# Altium PCB LEDDimmer.PcbDoc
Units mil, origin at the board's own origin, x right, y up, seen from the top; angles counter-clockwise.
Board outline 2708 x 1904 mil, 2 copper layers (Top Layer, Bottom Layer); 33 components, 16 nets, 85 pads, 57 vias.
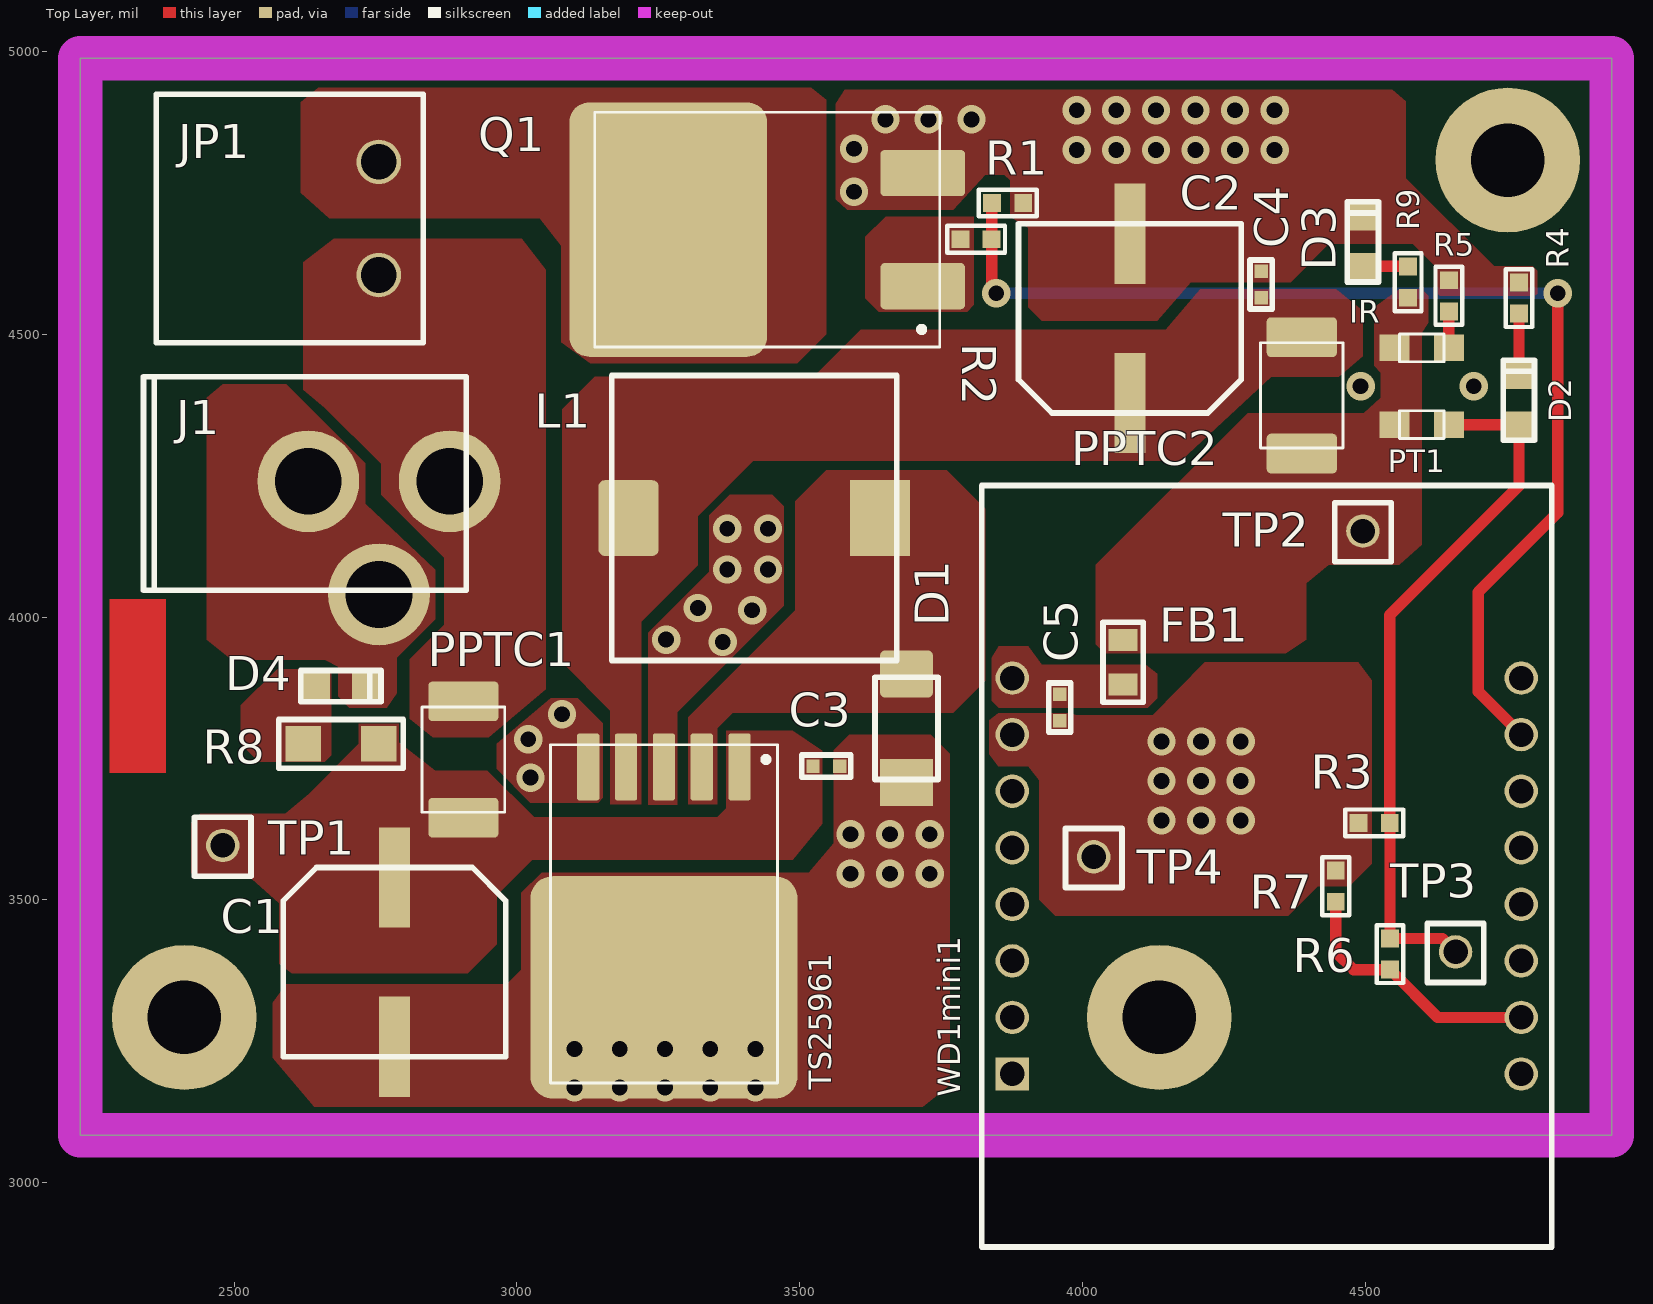
[diagram p0: Top Layer view]
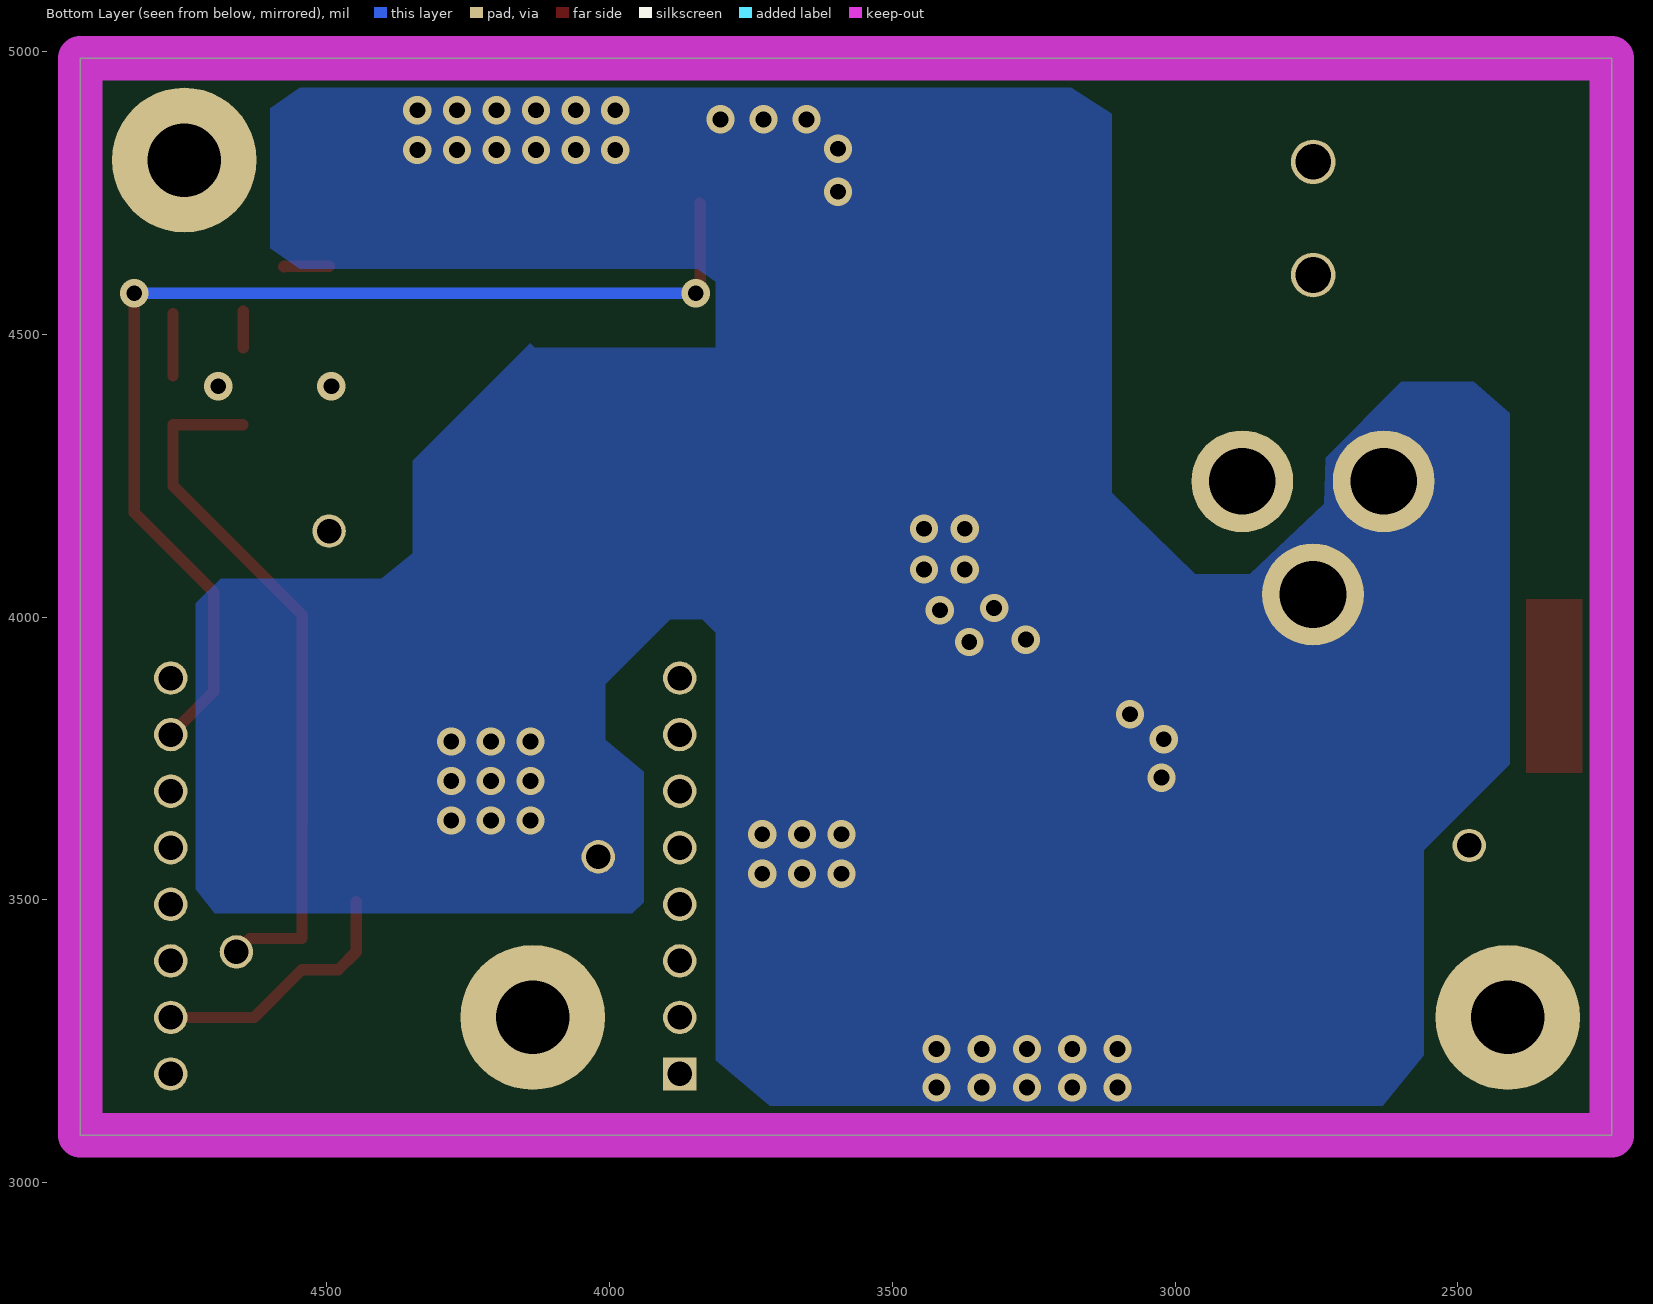
[diagram p1: Bottom Layer view, seen from below]
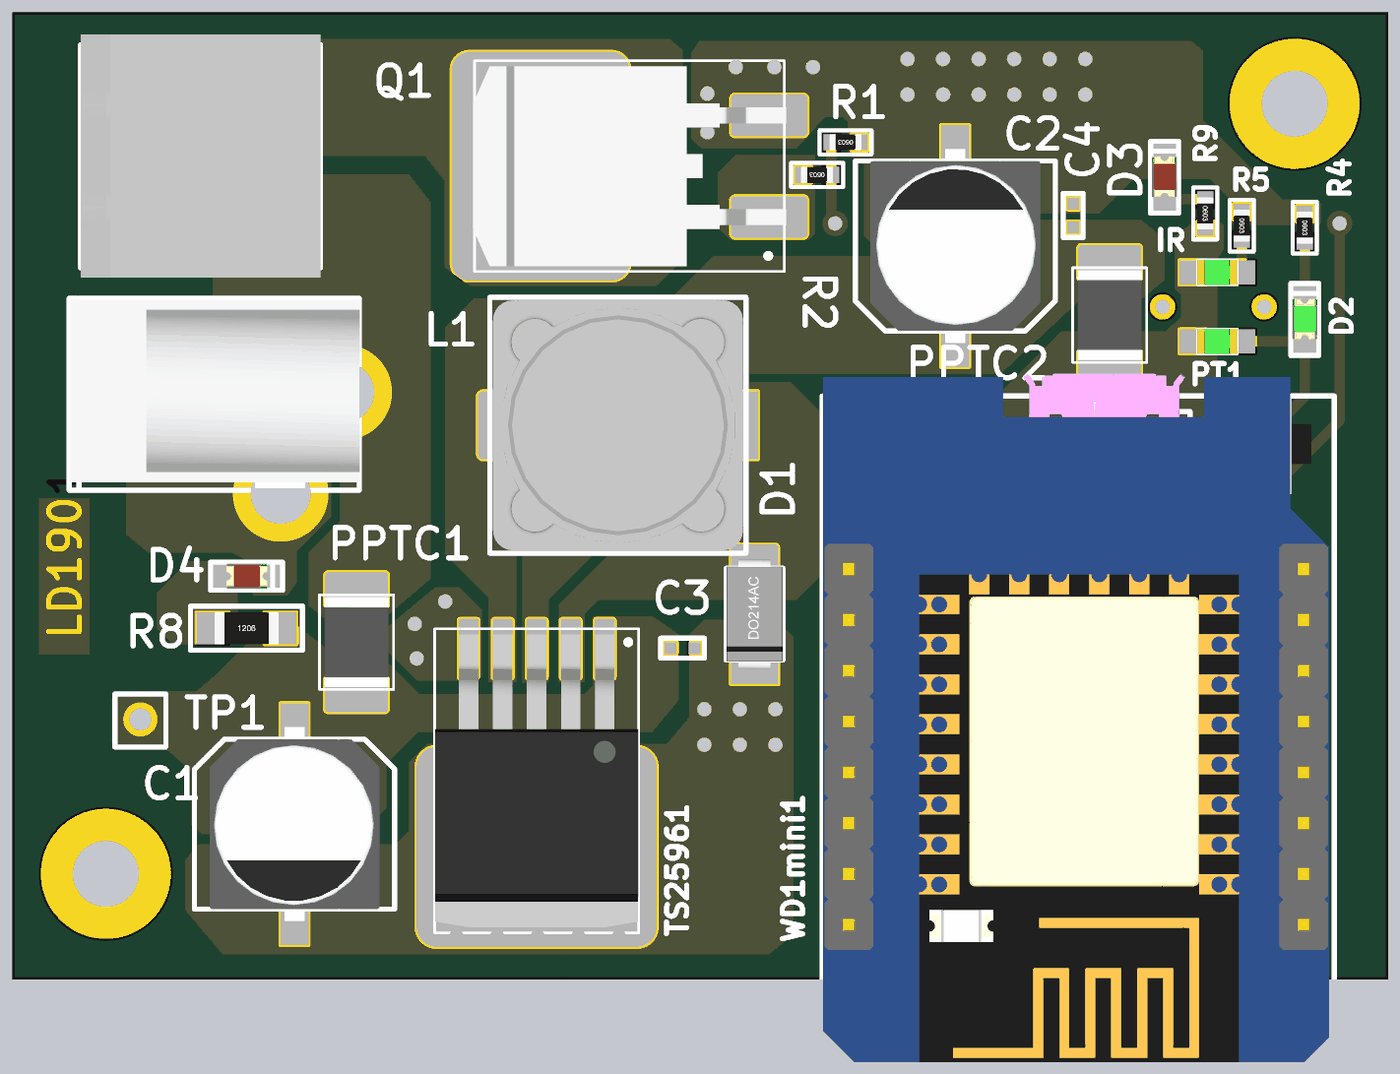
[diagram p2: 3D render of the assembled board from above, using the file's embedded part models]

## Layer stack, top to bottom
Top Solder: solder mask 0.4, Solder Resist, Dk 3.5
Top Layer: signal copper 1.4
Dielectric 1: dielectric 12.6, FR-4, Dk 4.8
Bottom Layer: signal copper 1.4
Bottom Solder: solder mask 0.4, Solder Resist, Dk 3.5

## Board outline
2228,3084 4936,3084 4936,4988 2228,4988

## Design rules (kind name [scope] priority, off if disabled: settings)
Clearance [All] p1: gap=10 ignorepadtopadclearanceinfootprint=FALSE
HoleSize [All] p1: absolutevalues=TRUE maxlimit=248.03 minlimit=27.56 maxpercent=80.000 minpercent=20.000
PolygonConnect [All] p1: connectstyle=Direct reliefconductorwidth=10 reliefentries=4 polygonreliefangle="90 Angle" airgapwidth=10
RoomDefinition LEDDimmer [InComponentClass('LEDDimmer')] p1: confinementstyle=ConfineIn formatcopy=TRUE lockcomponents=FALSE outline 2050,3050 5887,3050 5887,6887 2050,6887
RoutingVias [All] p1: holewidth=28 width=45 viastyle="Through Hole" minholewidth=28 minwidth=50 maxholewidth=28 maxwidth=50
SolderMaskExpansion [All] p1: expansion=4
Width [All] p1: maxlimit=100 minlimit=10 preferedwidth=10
29 further rules are at their usual default settings.

## Components (designator, comment, footprint, x,y, rotation, side; value= is the part's Value field where it differs from the comment)
C1 "470uF" ELKO_CAP 2783.46,3389.76 r270 top
C2 "470uF" ELKO_CAP 4084,4528 r90 top
C3 "100nF" FP_0402_CAP_050 3547.24,3736.22 r180 top
C4 "100nF" FP_0402_CAP_050 4316,4588 r270 top
C5 "100nF" FP_0402_CAP_050 3960,3840 r90 top
D1 "ZENER" SCHOTTKY 3688.98,3803.15 r90 top
D2 "LED" FP_0805_LED_GREEN 4772,4344 r90 top
D3 "LED" FP_0805_LED_RED 4496,4624 r90 top
D4 "LED" FP_0805_LED_RED 2649.61,3877.95 r0 top
FB1 "FB" FB 4072,3920 r270 top
IR "*" IRLED 4600,4476 r0 top (schematic designator IRLED1)
J1 "2.xmm" FP_DC_TAP_ANYA 2881.22,4240 r90 top
JP1 "JUMPER" CONN2 2755.91,4704.72 r90 top
L1 "33uH" IND 3420,4175 r270 top
PPTC1 "PPTC" PPTC 2905.51,3748.03 r270 top
PPTC2 "PPTC" PPTC 4388,4392 r270 top
PT1 "*" IRLED 4600,4340 r0 top
Q1 "NMOS" IRL540N 3442.72,4685.04 r90 top
R1 "100K" FP_0603_RES 3868,4732 r180 top
R2 "200" FP_0603_RES 3812,4668 r180 top value=200R
R3 "47K" FP_0603_RES 4516,3636 r0 top
R4 "220" FP_0603_RES 4772,4564 r270 top value=220R
R5 "220" FP_0603_RES 4648,4568 r270 top value=220R
R6 "1K" FP_0603_RES 4544,3404 r90 top
R7 "2K" FP_0603_RES 4448,3524 r270 top
R8 "1K, 0.25W" FP_1206_RES 2688.98,3775.59 r0 top
R9 "1K" FP_0603_RES 4576,4592 r270 top value=150R
TP1 "TP" FP_CONN1_TUSKE_254MM 2480,3596 r0 top
TP2 "TP" FP_CONN1_TUSKE_254MM 4496,4152 r0 top
TP3 "TP" FP_CONN1_TUSKE_254MM 4660,3408 r0 top
TP4 "TP" FP_CONN1_TUSKE_254MM 4020,3576 r0 top
TS25961 "*" TS2596 3260,3475 r180 top
WD1mini1 "WD1mini" WEMOSD1 4776,3892 r180 top

## Footprints (in the part's own frame and the unit in brackets; to place one, negate y for a bottom-side part, rotate by r counter-clockwise, add the part's x,y. Pads: shape width x height; smd on the part's side, far side on the other; paste and mask are expansions set on the pad)
CONN2 [mm] "CONN2"
  round 2 hole 1.6: 1(-2.54,0) 2(2.54,0)
  silkscreen extent -5.58,-2 5.58,10, body extent -6.08,-2 6.08,10, height 8.52
ELKO_CAP [mm] "Elko capactior"
  rect 4.5x1.4 smd: N(3.8,0) P(-3.8,0)
  silkscreen extent -4.25,-5 4.25,5, body extent -4.85,-4.25 4.85,4.25, height 10.3
FB [mm] "0603 ferrite bead"
  rect 1x1.3 smd: 1(-1,0) 2(1,0)
  silkscreen extent -1.8,-0.9 1.8,0.9, body extent -1,-0.62 1,0.63, height 0.62
FP_0402_CAP_050 [mm] "0.5mm magas 0402 kapacitás"
  rect 0.6x0.6 smd: 1(-0.6,0) 2(0.6,0)
  silkscreen extent -1.1,-0.5 1.1,0.5, body extent -0.5,-0.25 0.5,0.25, height 0.5
FP_0603_RES [mm] "0603 ellenállás"
  rect 0.8x0.8 smd: 1(-0.7,0) 2(0.7,0)
  silkscreen extent -1.3,-0.6 1.3,0.6, body extent -0.8,-0.4 0.8,0.4, height 0.44
FP_0805_LED_GREEN [mm] "0805 méretû zöld LED"
  rect 1.2x1.3 smd: A(-0.1,0) K(2.1,0)
  silkscreen extent -0.8,-0.7 2.8,0.7, body extent 0.01,-0.63 2.03,0.62, height 1.1
FP_0805_LED_RED [mm] "0805 méretû piros LED"
  rect 1.2x1.3 smd: A(-0.1,0) K(2.1,0)
  silkscreen extent -0.8,-0.7 2.8,0.7, body extent 0.01,-0.63 2.03,0.62, height 1.1
FP_1206_RES [mm] "1206 ellenállás"
  rect 1.6x1.6 smd: 1(-1.7,0) 2(1.7,0)
  silkscreen extent -2.8,-1.1 2.8,1.1, body extent -1.6,-0.8 1.6,0.8, height 0.62
FP_CONN1_TUSKE_254MM [mm] "1×1 tüskesor"
  round 1.5 hole 1.1: 1(0,0)
  silkscreen extent -1.27,-1.38 1.27,1.27, body extent -1.27,-1.27 1.27,1.27, height 8.54
FP_DC_TAP_ANYA [mil] "DC HEBA25 TÁPFESZÜLTSÉG ALJZAT ZÁRT, NYÁKBA 90°"
  round 180 hole 118: 1(0,0) 2(0,250) 3(-200,125)
  silkscreen extent -193,-30 185,541, body extent -190,-31 183,539, height 440
IND [mm] "Inductor 33uH"
  rect 3.4x2.7 smd: 1(0,5.65)
  rrect20% 3.4x2.7 smd: 2(0,-5.65)
  silkscreen extent -6.4,-6.4 6.4,6.4, body extent -6.25,-6.25 6.25,6.25, height 7.5
IRL540N [mm] "D2PAK"
  rrect20% 2.08x3.81 smd: 1(-2.54,-6.985) 3(2.54,-6.985)
  rrect20% 11.43x8.89 smd: 2(0,4.445)
  silkscreen extent -5.27,-7.75 5.27,7.75, body extent -5,-7.84 5,7.83, height 4.78
IRLED [mm] "Infrared led 0805"
  rect 1.35x1.2 smd: 1(-1.225,0) 2(1.225,0)
  silkscreen extent -1,-0.63 1,0.63, body extent -1,-0.62 1,0.62, height 1.1
PPTC [mm] "PPTC 1812"
  rrect20% 1.78x3.15 smd: 1(-2.615,0) 2(2.615,0)
  silkscreen extent -2.36,-1.86 2.36,1.86, body extent -2.25,-1.61 2.25,1.61, height 0.61
SCHOTTKY [mm] "Schottky"
  rect 2.115x2.37 smd: 1(-2.44,0)
  rrect20% 2.115x2.37 smd: 2(2.44,0)
  silkscreen extent -2.3,-1.42 2.3,1.42, body extent -2.74,-1.4 2.74,1.4, height 2.29
TS2596 [mm]
  rrect20% 1x3 smd: 1(-3.4,-6.6) 2(-1.7,-6.6) 3(0,-6.6) 4(1.7,-6.6) 5(3.4,-6.6)
  rrect20% 12x10 smd: 3(0,3.3)
  silkscreen extent -5.1,-7.6 5.1,7.6, body extent -5.08,-7.32 5.08,7.32, height 4.57
WEMOSD1 [mm] "WEMOSD1"
  rect 1.5x1.5 hole 1.1: 1(22.86,17.78)
  round 1.5 hole 1.1: 2(22.86,15.24) 3(22.86,12.7) 4(22.86,10.16) 5(22.86,7.62) 6(22.86,5.08) 7(22.86,2.54) 8(22.86,0) 9(0,0) 10(0,2.54) 11(0,5.08) 12(0,7.62) 13(0,10.16) 14(0,12.7) 15(0,15.24) 16(0,17.78)
  silkscreen extent -1.37,-8.65 24.23,25.55, body extent -1.28,-9.77 24.18,24.65, height 11.64

## Part data
C1 C2: library part CAP_ELECT, "Polarized Capacitor", ComponentLink1Description=Datasheet, ComponentLink1URL=https://lomex.hu/pdf/(tea)_xv_series.pdf, ComponentLink2Description=Store, ComponentLink2URL=https://lomex.hu/hu/webshop/#/search,91-00-97/stype,1, Supplier=91-00-97
C3 C4 C5: library part CAP_100n, "Capacitor", ComponentLink1Description=Datasheet, ComponentLink1URL=https://lomex.hu/pdf/(sam)_cl05b104ko5nnnd.pdf, ComponentLink2Description=Store, ComponentLink2URL=https://lomex.hu/hu/webshop/#/search,82-12-49/stype,1, Supplier=82-12-49
D1: "Zener Diode", ComponentLink1Description=Datasheet, ComponentLink1URL=https://lomex.hu/pdf/(tsc)_sk32a-sk315a.pdf, ComponentLink2Description=Store, ComponentLink2URL=https://lomex.hu/hu/webshop/#page,0/search,83-00-71/stype,1, Supplier=83-00-71, U_Z=24
D2 D3 D4: "Typical RED GaAs LED", ComponentLink1Description=Datasheet, ComponentLink1URL=https://lomex.hu/pdf/(kin)_kp-2012sgc.pdf, ComponentLink2Description=Store, ComponentLink2URL=https://lomex.hu/hu/webshop/#page,0/search,95-01-09/stype,1, Supplier=95-01-09
FB1: "Ferrite bead", ComponentLink1Description=Datasheet, ComponentLink1URL=https://lomex.hu/pdf/(vik)_cb.pdf, ComponentLink2Description=Store, ComponentLink2URL=https://lomex.hu/hu/webshop/#/search,93-03-10/stype,1, Supplier=93-03-10
IR: library part IRLED, "InfraLED", ComponentLink1Description=Datasheet, ComponentLink1URL=https://lomex.hu/pdf/(kin)_kp-2012f3c.pdf, ComponentLink2Description=Store, ComponentLink2URL=https://lomex.hu/hu/webshop/#page,0/search,84-00-89/stype,1, Supplier=84-00-89
J1: library part DC_TAP_ANYA, "2.xmm DC HEBA25 TÁPFESZÜLTSÉG ALJZAT ZÁRT, NYÁKBA 90°", ComponentLink1Description=Datasheet, ComponentLink1URL=https://lomex.hu/pdf/g-s/(g-s)_dcs-5521-5.pdf, ComponentLink2Description=Store, ComponentLink2URL=https://lomex.hu/hu/webshop/#/search,43-07-67/stype,1, Supplier=43-07-67
JP1: "Jumper Wire", ComponentLink1Description=Datasheet, ComponentLink1URL=https://lomex.hu/pdf/(tlm)_tlphc-300r-1112-xxp-x.pdf, ComponentLink2Description=Store, ComponentLink2URL=https://lomex.hu/hu/webshop/#page,0/search,43-22-79/stype,1, Supplier=43-22-79
L1: library part IND, "Inductor", ComponentLink1Description=Datasheet, ComponentLink1URL=https://lomex.hu/pdf/(vik)_pcdr.pdf, ComponentLink2Description=Store, ComponentLink2URL=https://lomex.hu/hu/webshop/#page,0/search,93-03-34/stype,1, Supplier=93-03-34
PPTC1 PPTC2: "Polymeric Positive Temperature Coefficient", ComponentLink1Description=Datasheet, ComponentLink1URL=https://lomex.hu/pdf/(lfs)_1812l.pdf, ComponentLink2Description=Store, ComponentLink2URL=https://lomex.hu/hu/webshop/#page,0/search,44-02-34/stype,1, Supplier=44-02-34
PT1: library part PTRANS, "Phototransistor", ComponentLink1Description=Datasheet, ComponentLink1URL=https://lomex.hu/pdf/k2012p3b.pdf, ComponentLink2Description=Store, ComponentLink2URL=https://lomex.hu/hu/webshop/#page,0/search,84-00-42/stype,1, Supplier=84-00-42
Q1: "NXP - BSP030,115 - MOSFET, N CH, 30V, 10A, SOT223", ComponentLink1Description=Datasheet, ComponentLink1URL=https://lomex.hu/pdf/irl540ns.pdf, ComponentLink2Description=Store, ComponentLink2URL=https://lomex.hu/hu/webshop/#page,0/search,86-03-68/stype,1, Supplier=86-03-68
R1: library part RES_100K, "Resistor", ComponentLink1Description=Datasheet, ComponentLink1URL=https://lomex.hu/pdf/(yag)_rc0603_serie.pdf, ComponentLink2Description=Store, ComponentLink2URL=https://lomex.hu/hu/webshop/#page,0/search,81-34-88/stype,1, Supplier=81-34-88
R2: library part RES_200R, "Resistor", ComponentLink1Description=Datasheet, ComponentLink1URL=https://lomex.hu/pdf/(koa)_rk73b.pdf, ComponentLink2Description=Store, ComponentLink2URL=https://lomex.hu/hu/webshop/#page,0/search,81-04-08/stype,1, Supplier=81-04-08
R3: library part RES_47K, "Resistor", ComponentLink1Description=Datasheet, ComponentLink1URL=https://lomex.hu/pdf/(asj)_generalthickfilmchipresistor_09102017.pdf, ComponentLink2Description=Store, ComponentLink2URL=https://lomex.hu/hu/webshop/#page,0/search,80-15-18/stype,1, Supplier=80-15-18
R4 R5: library part RES_220R, "Resistor", ComponentLink1Description=Datasheet, ComponentLink1URL=https://lomex.hu/pdf/(tcl)_cr03.pdf, ComponentLink2Description=Store, ComponentLink2URL=https://lomex.hu/hu/webshop/#page,0/search,81-10-18/stype,1, Supplier=81-10-18
R6: library part RES_1K, "Resistor", ComponentLink1Description=Datasheet, ComponentLink1URL=https://lomex.hu/pdf/(yag)_rc0603_serie.pdf, ComponentLink2Description=Store, ComponentLink2URL=https://lomex.hu/hu/webshop/#page,0/search,81-34-84/stype,1, Supplier=81-34-84
R7: library part RES_2K, "Resistor", ComponentLink1Description=Datasheet, ComponentLink1URL=https://lomex.hu/pdf/(yag)_rc0603_serie.pdf, ComponentLink2Description=Store, ComponentLink2URL=https://lomex.hu/hu/webshop/#page,0/search,80-04-42/stype,1, Supplier=80-04-42
R8: library part RES_1K_025W, "Resistor", ComponentLink1Description=Datasheet, ComponentLink1URL=https://lomex.hu/pdf/(yag)_rc1206_serie.pdf, ComponentLink2Description=Store, ComponentLink2URL=https://lomex.hu/hu/webshop/#/search,80-52-88/stype,1, Supplier=80-52-88
R9: library part RES_150R, "Resistor", ComponentLink1Description=Datasheet, ComponentLink1URL=https://lomex.hu/pdf/(tcl)_cr.pdf, ComponentLink2Description=Store, ComponentLink2URL=https://lomex.hu/hu/webshop/#/search,80-10-76/stype,1, Supplier=80-10-76
TP1 TP2 TP3 TP4: "Test Point"
TS25961: library part TS2596, "TS2596 Buck DCDC", ComponentLink1Description=Datasheet, ComponentLink1URL=https://lomex.hu/pdf/tsc/(tsc)_ts2596.pdf, ComponentLink2Description=Store, ComponentLink2URL=https://lomex.hu/hu/webshop/#page,0/search,89-09-14/stype,1, Supplier=89-09-14
WD1mini1: library part WEMOS, "Wemos D1 mini", ComponentLink1Description=Datasheet, ComponentLink1URL=https://lomex.hu/pdf/(t-t)_fhsh-2.54-xx.pdf, ComponentLink2Description=Store, ComponentLink2URL=https://lomex.hu/hu/webshop/#page,0/search,43-03-71/stype,1, Supplier=43-03-71

## Free pads (board coordinates)
  round 255.91 hole 129.92: 2(2412,3292) 3(4752,4808) 4(4136,3292)

## Via types
v1: diameter 50, hole 28, Top Layer to Bottom Layer, tented both sides, 55 vias
v2: diameter 50, hole 28, Top Layer to Bottom Layer, 2 vias

## Nets (pads, with @x,y where several pads share a name; then routed paths per layer and width w, separated by ;. In a path a pad name is that pad's centre, name@x,y a point inside that pad or via, vN(x,y) a via of type N, cw(c..) or ccw(c..) an arc to the next point about the centre after c; other vN are vias at no path point)
GND: C1.N C2.N C3.1 C4.1 C5.1 D1.1 D3.K D4.K J1.2 J1.3 Q1.3 R1.1 R3.1 R4.1 R5.1 R7.1 TP4.1 TS25961.3 TS25961.5 WD1mini1.7
  other v1: 3102,3168 3182,3168 3262,3168 3342,3168 3422,3168 3102,3236 3182,3236 3262,3236 3342,3236 3422,3236 3590,3546 3660,3546 3730,3546 3590,3616 3660,3616 3730,3616 4140,3640 4210,3640 4280,3640 4140,3710 4210,3710 4280,3710 3024,3716 4140,3780 4210,3780 4280,3780 3020,3784 3080,3828 3364,3956 3264,3960 3416,4012 3320,4016 3372,4084 3444,4084 3372,4156 3444,4156 3596,4752 3990,4826 4060,4826 4130,4826 4200,4826 4270,4826 4340,4826 3596,4828 3652,4880 3728,4880 3804,4880 3990,4896 4060,4896 4130,4896 4200,4896 4270,4896 4340,4896
NetC1_P: C1.P C3.2 PPTC1.2 R8.2 TP1.1 TS25961.1
NetC2_P: C2.P C4.2 L1.2 PPTC2.1 TS25961.4
NetC5_2: C5.2 FB1.2 WD1mini1.8
NetD1_2: D1.2 L1.1 TS25961.2
NetD2_1: D2.A PT1.2 R3.2 R6.2 TP3.1 | length 1252.9
  Top Layer w20: PT1.2 4771.94,4340 D2.A 4772,4232 4543.56,4003.56 R3.2 4543.99,3635.57 R6.2 4636.44,3431.56 TP3.1
NetD2_2: D2.K R4.2 | length 109.8
  Top Layer w20: D2.K 4772,4434.68 R4.2
NetD3_1: D3.A R9.1 | length 80.2
  Top Layer w20: D3.A 4575.5,4620.06 R9.1
NetD4_1: D4.A R8.1
NetIR_2: IR.2 R5.2 | length 64.5
  Top Layer w20: R5.2 4648.01,4476.22 IR.2
NetJP1_2: JP1.2 Q1.2
NetQ1_1: Q1.1 R2.2
NetR1_2: R1.2 R2.1 WD1mini1.10 | length 2026.2
  Top Layer w20: R1.2 3839.56,4731.11 R2.1 3839.56,4580.44 v1(3847.56,4572.44) ; WD1mini1.10 4700,3868 4700,4044 4840.44,4184.44 v1(4840.44,4572.44)
  Bottom Layer w20: v1(3847.56,4572.44) v1(4840.44,4572.44)
NetR6_1: R6.1 R7.2 WD1mini1.15 | length 464.5
  Top Layer w20: R7.2 4448.01,3407.99 4479.56,3376.44 R6.1 4628.44,3292 WD1mini1.15
VCC5: FB1.1 IR.1 PPTC2.2 PT1.1 R9.2 TP2.1
VCC12: J1.1 JP1.1 PPTC1.1
pads on no net: WD1mini1.1 WD1mini1.2 WD1mini1.3 WD1mini1.4 WD1mini1.5 WD1mini1.6 WD1mini1.9 WD1mini1.11 WD1mini1.12 WD1mini1.13 WD1mini1.14 WD1mini1.16
copper on no net:
  other v2: 4492,4408 4692,4408

## Polygon pours and split planes (outlines as drawn)
GND on Top Layer "Top Layer-No Net 1" (solid, pour order 96): 3851,3830 3835,3817.06 3835,3757.33 3851,3736 3904,3736 3924,3711 3924,3500 3952,3472 4364,3472 4416,3524 4472,3524 4512,3564 4512,3888 4488,3920 4216,3920 4124,3826 3989,3826 3981,3830
GND on Top Layer "Top Layer-No Net 1" (solid, pour order 90): 3828,4782 3862,4782 3872,4772 3872,4708 3904,4688 3904,4548 3928,4524 4132,4524 4192,4592 4368,4592 4436,4660 4584,4660 4624,4620 4624,4576 4632,4568 4800,4568 4804,4572 4804,4612 4796,4620 4728,4620 4572,4776 4572,4912 4548,4932 3580,4932 3564,4908 3564,4738.79 3584.33,4720 3772,4720
VCC5 on Top Layer "Top Layer-No Net 1" (solid, pour order 84): 4040,3936 4360,3936 4396,3960 4396,4060 4436,4092 4560,4092 4600,4128 4600,4502.68 4612,4520 4612,4568 4600,4580 4560,4580 4516,4548 4516,4444 4528,4432 4528,4387.65 4497.68,4360 4292,4360 4024,4092 4024,3952
NetD4_1 on Top Layer "Top Layer-No Net 1" (solid, pour order 78): 2660,3744 2672,3756 2672,3900 2664,3908 2576,3908 2512,3844 2512,3776 2544,3744
GND on Top Layer "Top Layer-No Net 1" (solid, pour order 76): 3024,3672 3144,3672 3152,3680 3152,3812 3108,3856 3060,3856 2964,3776 2964,3732
GND on Top Layer "Top Layer-No Net 1" (solid, pour order 68): 2592,3350.27 2982.27,3350.27 3008,3376 3008,3512 3044,3548 3516,3548 3560,3600 3560,3764 3588,3792 3731.62,3792 3765.81,3757.81 3765.81,3172 3715.49,3132 2643.34,3132 2568,3221.08 2568,3317.71
GND on Top Layer "Top Layer-No Net 1" (solid, pour order 62): 3232,3668 3284,3668 3284,3832 3472,4020 3472,4196 3452,4216 3376,4216 3340,4180 3340,4080 3232,3972
NetQ1_1 on Top Layer "Top Layer-No Net 1" (solid, pour order 60): 3640,4540 3616,4564 3616,4672 3652,4708 3808,4708 3808,4552 3796,4540
GND on Top Layer "Top Layer-No Net 1" (solid, pour order 40): 2788,3865.6 2788,3928 2856,3996 2856,4084 2732,4200 2732,4272 2592,4412 2480,4412 2452,4388 2452,3960 2496,3924 2660,3924 2684,3912 2684,3860 2704,3840 2769.71,3840
VCC12 on Top Layer "Top Layer-No Net" (solid, pour order 28): 2851,3787.4 2950.57,3787.4 3051.18,3872.54 3051.18,4322.83 3051.18,4614.17 3008.66,4669.29 2676.38,4669.29 2622.05,4627.5 2622.05,4402.23 2660.63,4370.08 2759.84,4270.87 2759.84,4216.54 2872,4104.38 2872,3986.17 2811.02,3925.2 2811.02,3819.88
NetJP1_2 on Top Layer "Top Layer-No Net" (solid, pour order 22): 2668.46,4704.72 3040.16,4704.72 3078.74,4656.5 3078.74,4485.56 3129.62,4448.82 3496.06,4448.82 3547.24,4500 3547.24,4914.39 3520.91,4936 2648.41,4936 2617.99,4910.29 2617.99,4750.08
NetD1_2 on Top Layer "Top Layer-No Net" (solid, pour order 2): 3303.15,3669.29 3303.15,3822.83 3492.13,4011.81 3492.13,4204.72 3547.48,4259.84 3759.84,4259.84 3828,4191.69 3828,3887.06 3771.65,3830.71 3381.89,3830.71 3354.33,3803.15 3354.33,3669.29
NetC1_P on Top Layer "Top Layer-No Net" (solid, pour order 38): 2601.92,3370.08 2913.39,3370.08 2964.57,3421.26 2964.57,3507.87 3027.56,3570.87 3487.47,3570.87 3540,3634.08 3540,3763.34 3488.19,3799.21 3370.08,3799.21 3370.08,3661.42 3354.33,3645.67 3030.33,3645.67 2947.65,3728.35 2856.02,3728.35 2791.34,3778.65 2791.34,3811.02 2720.47,3811.02 2720.47,3775.59 2632.44,3687.56 2590.55,3652 2440,3652 2424,3636 2424,3548 2435.03,3536.97 2531.6,3536.97 2580,3493.5 2580,3386.99
NetC5_2 on Top Layer "Top Layer-No Net 1" (solid, pour order 80): 3840,3928 3840,3852 3852,3840 4116,3840 4132,3856 4132,3900 4112,3916 3928,3916 3904,3948 3852,3948
NetC2_P on Top Layer "Top Layer-No Net 1" (solid, pour order 44): 3320,4178.27 3417.73,4276 4173.64,4276 4333.68,4425.2 4453.55,4425.2 4496,4460.75 4496,4541.82 4449.33,4580 4208,4580 4147.26,4508 3608,4508 3525.2,4425.2 3137.8,4425.2 3080,4367.4 3080,3920 3165.35,3834.65 3165.35,3669.29 3220,3669.29 3220,3991.65 3320,4091.65
GND on Bottom Layer "Top Layer-No Net 1" (solid, pour order 94): 2408,3740 2560,3588 2560,3225.26 2632.65,3136 3716.83,3136 3812,3216.06 3812,3972 3836,3996 3893.18,3996 4008,3881.18 4008,3782.82 3940,3726.82 3940,3496 3960,3476 4698.57,3476 4732,3518.55 4732,4024 4688,4068 4404,4068 4348,4112.89 4348,4276 4140,4484 4132,4476 3812,4476 3812,4593.23 3844.89,4616 4548,4616 4600.16,4652 4600.16,4899.56 4548,4936 3184,4936 3112,4889.64 3112,4220 2964,4076 2868,4076 2736,4200 2734,4282 2600,4416 2472,4416 2408,4360

## Keep-outs
Keep-Out Layer:
  the board outline again, w78.74

## Other copper
Top Layer:
  rectangle: 2280,3724 2380,4032

## Silkscreen, mask and mechanical layers (free items; w line width, h text height)
Top Solder:
  the board outline again, w10
  text "LD1901" at 2360,3748 h60 r90

## Dimensions
2255.91,3104 to 4897.64,3104 on Mechanical 1
2255.91,3104 to 2255.91,5040 on Mechanical 1